# Altium PCB Copy of corePCB3.PcbDoc (part 3 of 3)
Units mil, origin at the board's own origin, x right, y up, seen from the top; angles counter-clockwise.
Board outline 6000 x 4000 mil, 6 copper layers (Top Layer, Layer 3, Layer 1, Layer 2, Layer 4, Bottom Layer), stack 32.111 mil thick; 90 components, 166 nets, 637 pads, 492 vias.
Unrouted connection lines stored in the file: 227.
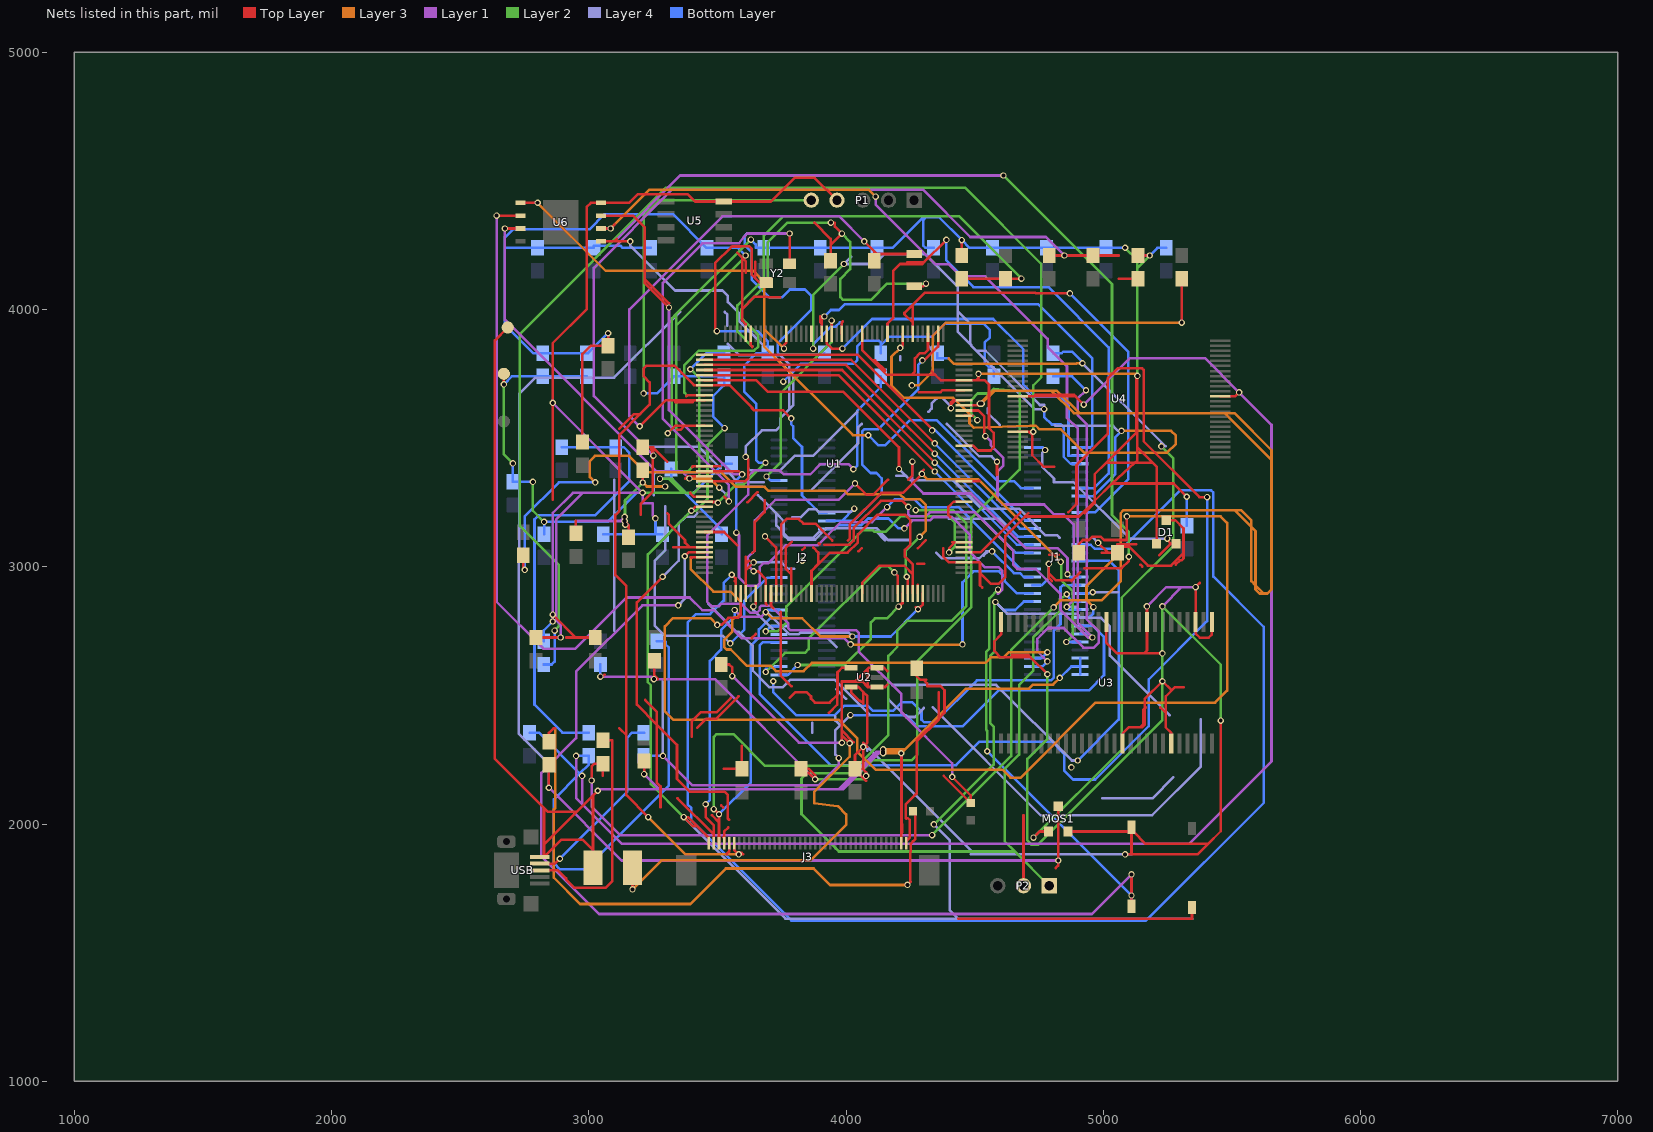
[diagram p7: the nets of this part, all layers, seen from the top]

## Via types
v1: diameter 25, hole 15, Top Layer to Bottom Layer, 492 vias

## Nets (pads, with @x,y where several pads share a name; then routed paths per layer and width w, separated by ;. In a path a pad name is that pad's centre, name@x,y a point inside that pad or via, vN(x,y) a via of type N, cw(c..) or ccw(c..) an arc to the next point about the centre after c; other vN are vias at no path point) (continued)
LED1: J1.56 U1.56 | length 2029.7
  Top Layer w10: U1.56@3747.85,2896.24 3747.85,3040 3747.85,3164.92 3769.44,3186.5 3815.47,3186.5 3834.47,3167.5 3881,3167.5 3946.5,3102 ; 3893.5,3091.5 3897,3088 ; 4007.74,3102 4013.83,3108.09 4013.83,3163.54 4137.79,3287.5 4221.5,3287.5 v1(4295,3361) ; v1@4294.51,3369.51 4302,3377
  Layer 2 w10: v1(4835,3019) 4837.5,3016.5 4837.5,2947.5 4882,2903 4882,2732.6 v1(4857,2707.6)
  Layer 3 w10: v1(4295,3361) 4315,3341 4513,3341 v1(4835,3019)
  Bottom Layer w10: v1(4857,2707.6) J1.56@4910,2707.6
NetC1_1: C1.1 D1.3 U1.6 | length 2829.4
  Top Layer w10: U1.6@3450,3725.59 3488.98,3725.59 ; v1(4206,3380) 4206,3464 3990,3680 3696,3680 3650.41,3725.59 3522.14,3725.59 ; 4791,3047.5 4827,3047.5 ; v1(4980,3093) 5018,3055 ; 4995,3055 5018,3055 ; 5129,3088 5055.06,3088 C1.1@5055.06,3078.5 ; 5145,3008 5152,3001 ; D1.3@5245,3181.26 5280,3181.26 5312,3149.26 5312,3052.87 ; 5281.42,3008 5298,3024.59 5303.59,3024.59 5312,3033 5312,3052.87 ; 3488.98,3725.59 3522.14,3725.59 ; 3488.98,3725.59 3490.14,3726.75 3520.98,3726.75 3522.14,3725.59 ; 5018,3055 C1.1@5055.06,3055 C1.1@5055.06,3078.5 ; C1.1@5055.06,3078.5 5099.76,3078.5 5173.76,3004.5 5263.63,3004.5 5312,3052.87
  Layer 4 w10: 4195,3353 4233,3353 ; v1(4206,3380) 4233,3353 ; 4233.46,3353 4233,3353 ; 4400,3186.46 4597.54,3186.46 4622.67,3161.33 ; 4830,3113 4820,3123 4798,3123 4797,3122 4776,3122 4672,3226 4529,3226 4419,3336 4250,3336 4233,3353 ; 4960,3113 v1(4980,3093)
NetC2_2: C2.2 C4.2 R2.1 U1.38 | length 756.8
  Top Layer w10: C2.2@2950.06,3130 2950.06,3177.94 ; v1(3139.06,3177.94) 3155.06,3161.94 ; v1(3142.51,3164) 3155.06,3161.94 ; v1@3144.25,3162.5 3155.06,3151.68 ; C4.2@3155.06,3115 3155.06,3151.68 ; v1(3210,3327.55) R2.1@3210,3375 ; 3155.06,3151.68 3155.06,3161.94
  Layer 1 w10: 2950.06,3177.94 3123.06,3177.94 ; v1(3139.06,3177.94) 3123.06,3177.94 ; v1(3139.06,3193.94) 3123.06,3177.94
  Layer 2 w10: v1(3139.06,3193.94) 3139.06,3256.61 3142.51,3260.06 ; v1(3142.51,3164) 3142.51,3260.06 ; v1(3210,3327.55) 3142.51,3260.06
  Layer 3 w10: v1(3210,3327.55) 3225.55,3312 v1(3296.67,3312)
NetC3_1: C3.1 U1.81 | length 2461.4
  Top Layer w10: v1@2745,2998.06 v1@2745.06,2998.13 ; C3.1@2745.06,3045 v1@2745.06,2998.13 ; v1(2751,2988) 2745.06,2993.94 v1@2745.06,2998.13 ; v1(4236,2961) 4239.98,2957.02 4239.98,2933.98 U1.81@4239.98,2896.24
  Layer 2 w10: v1(4236,2961) 4231.5,2965.5 4231.5,3061.5 v1(4286,3116)
  Layer 3 w10: v1(3025,3328) 3004,3349 3004,3411 3024,3431 3157,3431 3221,3367 3515.78,3367 3572.5,3310.28 3683.54,3310.28 3698.82,3295 3995.08,3295 4008.58,3281.5 4209.84,3281.5 4228.54,3262.8 4288,3262.8 4310.5,3240.3 4310.5,3140.5 v1(4286,3116)
  Bottom Layer w10: v1(2751,2988) 2751,3195 2884,3328 v1(3025,3328)
NetC5_1: C5.1 U1.125 | length 1581.9
  Top Layer w10: 4282.5,3678.5 4367.29,3678.5 4375.01,3686.22 U1.125@4459.09,3686.22 ; v1(5305.06,3949.06) C5.1@5305.06,4120
  Layer 3 w10: v1(4256,3705) 4282.83,3705 4337.83,3760 4337.83,3898.26 4388.64,3949.06 v1(5305.06,3949.06)
NetC8_2: C8.2 U1.9 Y1.1 | length 2259.8
  Top Layer w10: 3379,3663 3382.54,3666.54 U1.9@3450,3666.54 ; 3877.13,4338 3940.06,4275.06 3940.06,4251.45 ; C8.2@3940.06,4190 3940.06,4251.45 ; v1(3941,4338) 3957,4338 3957,4322 v1(3983.81,4295.19) 3940.06,4251.45 ; Y1.1@4265,4090 4300,4090 v1(4311,4101)
  Layer 2 w10: 3382.54,3666.54 3371.5,3677.57 3371.5,3784 3427.5,3840 3643,3840 3659,3856 3659,3900.93 3593.5,3966.43 3593.5,4000.5 3696.5,4103.5 3696.5,4262 3772.5,4338 v1(3941,4338) ; v1(3983.81,4295.19) 4016,4263 4016,4157 3978.26,4119.26 3978.26,4048 3989.01,4037.24 4096.37,4037.24 4160.13,4101 v1(4311,4101)
NetC9_2: C9.2 U1.10 Y1.2 | length 2204.7
  Top Layer w10: v1(3198,3546) 3298.85,3646.85 3410.13,3646.85 ; 3336.22,3639.22 3402.5,3639.22 3410.13,3646.85 ; U1.10@3450,3646.85 3410.13,3646.85 ; v1(4071,4265) 4110.06,4225.94 ; C9.2@4110.06,4190 C9.2@4110.06,4215.98 ; Y1.2@4265,4215.98 C9.2@4120.02,4215.98 ; C9.2@4110.06,4215.98 C9.2@4120.02,4215.98 ; C9.2@4110.06,4215.98 4110.06,4225.94 ; 4110.06,4225.94 C9.2@4120.02,4215.98
  Layer 1 w10: v1(3198,3546) 3158,3586 3158,4000 3520,4362 3974,4362 v1(4071,4265)
NetC10_2: C10.2 U1.30 Y2.1 | length 1888
  Top Layer w10: U1.30@3450,3253.15 U1.30@3479,3253.15 ; 3482.65,3250.5 3482.15,3250 U1.30@3479,3253.15 ; v1(3498,3916) 3491.5,3922.5 v1@3491.5,3925.5 ; v1@3501,3916 v1@3491.5,3925.5 ; v1(3502,3249) 3497.85,3253.15 U1.30@3479,3253.15 ; 3590.58,4243.42 3554.56,4243.42 ; 3616.5,3250.5 3656,3290 ; 3648,4186 3648,4121 ; Y2.1@3690,4105 3664,4105 3648,4121 ; v1@3491.5,3925.5 3491.5,4180.36 3554.56,4243.42 ; 3554.56,4243.42 3557.14,4246 3624,4246 3633,4237 3633,4136 3648,4121
  Layer 2 w10: v1(3502,3249) 3572.5,3319.5 3602,3319.5 v1(3687,3404.5)
  Bottom Layer w10: v1(3498,3916) 3656.61,3916 3696.07,3876.55 C10.2@3696.07,3830.59 3652.59,3830.59 3605,3783 3605,3680 3651.5,3633.5 3651.5,3413.55 3660.55,3404.5 v1(3687,3404.5)
NetC11_2: C11.2 U1.29 Y2.3 | length 2846.3
  Top Layer w10: 3394,3286.83 3408,3272.83 U1.29@3450,3272.83 ; 3526.17,3272.83 v1(3545,3254) ; Y2.3@3780.55,4177.83 v1@3780.55,4286.55 ; v1(3780.55,4295.5) v1@3780.55,4286.55 ; v1@3781,4287 v1@3780.55,4286.55
  Layer 1 w10: v1(3545,3254) 3545,3318 3288,3575 3288,4104 3441.34,4257.34 3584,4257.34 3603.34,4282.84 3616,4295.5 v1(3780.55,4295.5)
  Bottom Layer w10: v1(3780.55,4295.5) 3616,4295.5 3606,4285.5 3606,4250 3633,4223 3633,4116.5 3702,4047.5 3751.5,4047.5 3782,4078 3840,4078 3866,4052 3866,4000 3735,3869 3735,3832 3743,3824 3916.07,3824 C11.2@3916.07,3830.59
NetC28_2: C28.2 J3.1 | length 1079.7
  Top Layer w10: J3.1@4234.65,1925 4234.65,1934 4248,1947.35 4248,2015 4240,2023 4233,2023 ; 4234.65,2021.35 4233,2023 ; C28.2@4275,2605 4275,2574 4288,2561 4301,2561 ; 4311.45,2561 4301,2561 ; 4361.22,2511.24 4361.22,2410.81 ; 4233,2023 4233,2077 4274.69,2118.69 4274.69,2320.26 ; 4274.69,2320.26 4274.69,2324.29 4361.22,2410.81 ; 4274.69,2320.26 4361.22,2406.78 4361.22,2410.81 ; 4301,2561 4315.72,2546.28 4315.72,2536.5 4366.5,2536.5 4383,2520 4383,2432.59 4361.22,2410.81
NetC29_2: C29.2 F1.2 U2.1 U2.3 | length 2892.6
  Top Layer w10: v1(3170,1746) F1.2@3170,1830 ; C29.2@3515,2620 3546,2620 3558,2608 v1(3558,2575) ; v1(3984,2316) 3984,2344 ; v1(4014,2314) 3984,2344 ; 4030,2317 3984,2363 ; 4161,2541.6 4152,2532.6 U2.1@4120,2532.6 4086.4,2532.6 ; 4161,2594.37 4147.97,2607.4 U2.3@4120,2607.4 4088,2607.4 4084,2603.4 ; 3984,2344 3984,2363 ; 3984,2363 3984,2554 4034.6,2554 ; 4034.6,2554 4084,2603.4 ; 4034.6,2554 4065,2554 ; 4065,2554 4084,2535 ; 4065,2554 4084,2532.6 ; 4084,2532.6 4086.4,2532.6 ; 4084,2532.6 4084,2535 ; 4084,2535 4086.4,2532.6 ; 4084,2535 4084,2603.4
  Layer 1 w10: v1(3558,2575) 3817,2316 v1(3984,2316)
  Layer 3 w10: v1(3170,1746) 3282.5,1858.5 3862,1858.5 4000.5,1997 4000.5,2037 3968,2069.5 3876.5,2080 3876.5,2124 4014,2261.5 v1(4014,2314)
NetC30_2: C30.2 U2.4 | length 959.2
  Top Layer w10: 3401,2339.84 3401,2400 3435,2434 3496,2434 3552.5,2490.5 ; 3525.84,2215 C30.2@3595.06,2215 3595.06,2304 ; 3780.5,2490.5 3803,2513 3847,2513 3864,2496 3864,2487 3879,2472 3936,2472 3966,2502 ; 3934,2432 3966,2464 3966,2502 ; U2.4@4020,2607.4 3984,2607.4 3968,2591.4 ; 3966,2502 3966,2589.4 3968,2591.4 ; 3966,2502 3968,2504 3968,2591.4
NetC35_2: C35.2 C36.2 R16.1 U4.12 U4.37 | length 7906.4
  Top Layer w10: U4.12@4667.6,3662.48 4730.5,3662.48 ; v1(4924.33,3630.5) 4918.33,3636.5 4892.35,3662.48 ; U4.37@5455,3662.48 5512.48,3662.48 v1(5528,3678) ; 4730.5,3662.48 4892.35,3662.48 ; 4730.5,3662.48 4736.52,3668.5 4886.33,3668.5 4892.35,3662.48
  Layer 1 w10: v1(2951,2265) 2951,2101 2974,2078 ; v1(2974,2187) 2974,2078 ; v1(4924.33,3630.5) 5104.83,3811 5395,3811 v1(5528,3678) 5654,3552 5654,2243 5333.89,1922.89 3129.11,1922.89 2974,2078
  Bottom Layer w10: C36.2@2770.06,2355 2806,2355 2964.5,2196.5 ; v1(2951,2265) R16.1@3000.06,2265 3000.06,2232.06 2964.5,2196.5 ; v1(2974,2187) 2964.5,2196.5 ; C35.2@3265.06,2710 3297.5,2710 3298.5,2709 3298.5,2698.5 3311.5,2685.5 3311.5,2149.27 2986.23,1824 2888,1824 2864,1848 2864,2096 2964.5,2196.5
NetDS0_1: DS0.1 R10.2 | length 2465.6
  Top Layer w10: R10.2@2845,2320 2845,2354 2864,2373 2869,2373 ; v1(4239,1763) 4249,1773 ; 4251,1775 4249,1773 ; DS0.1@4260,2050 4270,2050 4270,1942 4260,1932 4251,1923 4251,1892 4249,1890 4249,1773
  Layer 3 w10: 2864,2373 2869,2368 2869,2062 2864,2057 2864,1791 2966,1689 3394.94,1689 3532.94,1827 3874,1827 3938,1763 v1(4239,1763)
NetMOS1_1: MOS1.1 R13.2 R14.2 | length 3038.5
  Top Layer w10: v1(4729,1947) 4752.79,1970.79 MOS1.1@4787.6,1970.79
  Layer 2 w10: v1(4729,1947) 5072,2290 5072,2880 5272.5,3080.5 5272.5,3421.5 v1(5226,3468)
  Layer 3 w10: 4399,3810 4420.5,3788.5 4893.89,3788.5 4896.39,3791 v1(4919,3791)
  Layer 4 w10: v1(4919,3791) 5226,3484 ; v1(5226,3468) 5226,3484 ; 5242,3468 5226,3484
  Bottom Layer w10: R14.2@4355.06,3830 4355.06,3810 4399,3810 ; R13.2@4805.06,3830 4838.16,3830 4843.78,3835.62 4880,3835.62 4919,3796.62 v1(4919,3791)
NetPWR_1: PWR.1 R15.1 | length 3086.2
  Top Layer w10: 4380,2186.93 PWR.1@4485,2081.93 4485,2111 v1(4413,2183)
  Layer 1 w10: v1(4029,3379) 4009,3399 3901,3399 3861,3359 3758,3359 3742,3375 3643,3375 3619.97,3351.97 3619.97,3280.97 3460,3121 3460,2864 3477,2847 3506.5,2847 3515,2855.5 3593.5,2855.5 3627.5,2821.5 3654.5,2821.5 3664,2831 3664,2841 3672,2849 3707,2849 3776,2780 3776,2760.5 3784,2752.5 4040.5,2752.5 4049,2744 4049,2671 4215.5,2504.5 4215.5,2433.5 4413,2236 v1(4413,2183)
  Bottom Layer w10: v1(4029,3379) 4044,3394 4044,3607 4135.06,3698.06 R15.1@4135.06,3740
NetR1_1: R1.1 U1.48 | length 4685.7
  Top Layer w10: v1(3499.5,2774) 3515.5,2774 3543,2801.5 3579.5,2801.5 3591,2813 3591,2862 3590.37,2862.63 ; 3590.37,2862 3590.37,2862.63 ; U1.48@3590.37,2896.24 3590.37,2862.63 ; R1.1@4905.06,3055 4905.06,3088 4921.06,3104 4944.09,3104 4956.59,3116.5 4991,3116.5 5003.5,3104 5091.06,3104 ; v1@5091.06,3196.94 5091.06,3104 ; v1(5092,3196) 5092,3104 5091.06,3104
  Layer 3 w10: v1(3499.5,2774) 3473.5,2800 3328,2800 3296,2768 3296,2438 3328,2406 3971,2406 4043.5,2333.5 4043.5,2282.5 4115,2211 4609,2211 4639.5,2180.5 4679.5,2180.5 4970.5,2471.5 5434.5,2471.5 5482,2519 5482,3170 5456,3196 v1(5092,3196)
NetR4_1: R4.1 R5.1 U1.171 | length 1916
  Top Layer w10: U1.171@3629.74,3905.33 3629.74,3862 3635,3856.74 3635,3854 ; R5.1@4450.06,4120 R4.1@4620.06,4120 v1(4682,4120)
  Layer 2 w10: 3635,3856.74 3577.5,3914.24 3577.5,4016.5 3680.5,4119.5 3680.5,4287.33 3756.17,4363 4439,4363 v1(4682,4120)
NetR11_2: R11.2 USB.3 | length 907.6
  Top Layer w10: USB.3@2809,1820 2880,1820 2912,1788 2912,1784 2944,1752 3065,1752 3092,1779 3092,2325 R11.2@3055.06,2325
NetR12_2: R12.2 USB.2 | length 740
  Top Layer w10: USB.2@2809,1845.59 2868.59,1845.59 v1(2888,1865)
  Bottom Layer w10: v1(2888,1865) 3150,2127 3150,2337 3168,2355 R12.2@3215,2355
NetR18_1: R18.1 U4.19 | length 4700.6
  Top Layer w10: U4.19@4667.6,3524.68 4712,3524.68 ; v1(4728,3524.68) 4712,3524.68 ; 4808.5,3389.5 4768,3389.5 4724,3433.5 4724,3512.68 4712,3524.68
  Layer 2 w10: v1(2867,2752) 2884,2769 2884,3006 2732,3158 2732,3905 3301,4474 4462,4474 4759,4177 4759,3736 4728,3705 v1(4728,3524.68)
  Bottom Layer w10: R18.1@2825.06,2620 2856,2620 2867,2631 v1(2867,2752)
NRF_CE: J2.25 U1.155 | length 818
  Top Layer w10: v1(3944,3957) 3944.7,3956.3 3944.7,3940.3 U1.155@3944.7,3905.33
  Layer 2 w10: v1(3691,3351) 3747,3407 3747,3676 3944,3873 v1(3944,3957)
  Bottom Layer w10: v1(3691,3351) 3706.06,3335.94 J2.25@3740,3335.94
NRF_CS: J1.34 U1.153 | length 2588
  Top Layer w10: U1.153@3984.07,3905.33 3984.07,3950.07 3988,3954
  Layer 2 w10: v1(3872,3848) 3872,4057 v1(3992,4177)
  Layer 4 w10: 4020,4205 v1(3992,4177) 4111,4177 4148.5,4214.5 4308.5,4214.5 4318,4205 4435,4088 4435,3993 ; 4508.63,3839.75 4543.25,3839.75 4754,3629 4770,3629 ; v1(4770,3613) 4733.5,3613 4486.17,3860.33 4486.17,3862.22 4483.5,3864.89 ; 4435,3993 4435,3913.39 4483.5,3864.89 ; 4435,3993 4483.5,3944.5 4483.5,3864.89
  Bottom Layer w10: v1(3872,3848) 3872,3864 3941.5,3933.5 3959.65,3933.5 3976.22,3950.07 3984.07,3950.07 ; v1(4770,3613) 4770,3583 4800,3553 4835.59,3553 4846.5,3542.09 4846.5,3427.5 4873.49,3400.51 J1.34@4910,3400.51
PA0: J2.42 U1.40 WKUP.1 | length 6551.3
  Top Layer w10: v1(3373,3041) 3388.3,3056.3 U1.40@3450,3056.3 ; WKUP.1@5110,1680 v1(5110,1722) 5110,1786 v1(5110,1804)
  Layer 1 w10: v1(3348,2850) 3209,2850 2951,2592 2951,2334 2816,2199 2816,1874 3040,1650 4956,1650 v1(5110,1804) ; v1(4227,3149) 4258.5,3180.5 4326.5,3180.5 4339.5,3193.5 4411.69,3193.5 4481.5,3123.69 4481.5,3057 4541,2997.5 4594.04,2997.5 4608,2983.54 4608,2912 4591,2895 v1(4591,2911)
  Layer 2 w10: v1(4549,2283) 4549,2362.03 4544.5,2366.53 4544.5,2668.5 4557.5,2681.5 4557.5,2877.5 v1(4591,2911)
  Layer 4 w10: v1(3348,2850) 3373,2875 v1(3373,3041)
  Bottom Layer w10: J2.42@3925.04,3146.97 3955.5,3146.97 3969.22,3160.69 4059.19,3160.69 4086,3187.5 4164.92,3187.5 4203.42,3149 v1(4227,3149) ; v1(4549,2283) v1(5110,1722)
PA1: J1.3 U1.41 | length 1949.8
  Top Layer w10: 3396.39,3036.61 3400.09,3036.61 ; U1.41@3450,3036.61 3402.41,3036.61 ; 3400.09,3036.61 3402.41,3036.61 ; 3400.09,3036.61 3401.25,3035.46 3402.41,3036.61
  Layer 3 w10: 3396.39,3036.61 3396.39,2992.11 3485,2903.5 3551.78,2903.5 3590.5,2864.78 3590.5,2817 3577.07,2803.57 3568,2803.57 3557.5,2793.07 3557.5,2747 3526.5,2716 3526.5,2688 3536,2678.5 3552,2678.5 3616,2614.5 3708,2614.5 3728,2594.5 3835.5,2594.5 3867.5,2626.5 4541.83,2626.5 4562.83,2647.5 4612.5,2647.5 4632.5,2667.5 v1(4783,2667.5)
  Bottom Layer w10: J1.3@4724.96,2644.61 4760.11,2644.61 v1(4783,2667.5)
PA3: J1.44 U1.47 | length 5918.1
  Top Layer w10: v1(3556,2969) 3570.69,2954.31 3570.69,2941.31 ; 3567,2945 3570.69,2941.31 ; U1.47@3570.69,2896.24 3570.69,2941.31
  Layer 4 w10: 3930,2721 3963,2688 ; 3963,2523.5 4000,2486.5 ; 4164,2486.5 4234.5,2416 4268,2416 4303,2451
  Bottom Layer w10: v1(3556,2969) 3524,2937 3524,2868 3472,2816 3416,2816 3384,2784 3384,2076 3398.5,2061.5 3398.5,2013 3787.5,1624 5166,1624 5624,2082 5624,2766 5428,2962 5428,3288 5419,3297 5298,3297 5070.27,3069.27 4967.33,3069.27 4951.04,3085.55 J1.44@4910,3085.55
PA5: J1.46 U1.51 | length 2003
  Top Layer w10: 3633.43,2722.57 3649.43,2738.57 ; 3649.43,2854.43 U1.51@3649.43,2896.24
  Layer 4 w10: v1(3640,2845) 3640,2832 3719.5,2752.5 ; 4180.45,2540.38 4278,2540.38 4278.62,2541 4584,2541 4878.16,2246.84 v1(4901,2246.84)
  Bottom Layer w10: v1(4901,2246.84) 5059.93,2405.77 5059.93,2986.63 5024,3022.56 J1.46@4910,3022.56
PA7: J1.48 U1.53 | length 2305.9
  Top Layer w10: v1(3641,2982.8) 3657,2982.8 3688.8,2951 U1.53@3688.8,2896.24 3688.8,2856 3692.44,2852.36 ; 3746,2824.04 3746,2577 3788,2535 ; v1(4035,3324) 4079,3280 4105,3280 4164,3339 ; 4243,3339 4258,3354 v1(4258,3409)
  Layer 1 w10: v1(3641,2982.8) 3617.5,3006.3 3617.5,3036 3645.5,3064 3645.5,3180.5 3725,3260 3971,3260 v1(4035,3324) ; v1(4258,3409) 4258,3328 4301.06,3284.94 4486.06,3284.94 4698.35,3072.65 4822.35,3072.65 4861,3034 v1(4861,2971)
  Bottom Layer w10: v1(4861,2971) 4872.43,2959.57 J1.48@4910,2959.57
PA9: J1.51 P2.1 U1.120 | length 4798.5
  Top Layer w10: U1.120@4459.09,3587.8 4493.2,3587.8
  Layer 2 w10: v1(4511,3570) 4487,3594 4487,3648.5 4512,3673.5 4555.5,3673.5 4574,3692 4675,3682 4675,3378 4487.06,3190.06 4487.06,2843.06 4277.5,2633.5 4277.5,2269.5 4256,2248 4105,2248 4054.5,2197.5 3848.5,2197.5 3827,2176 3827,2038 3972,1893 4657,1893 ; P2.1@4790,1760 4657,1893 ; v1(4858,2893) 4858,2891 4832,2875 4832,2829 4727.5,2724.5 4727.5,2595.41 4673.04,2540.95 4673.04,2270.04 4617,2214 4617,1933 4657,1893
  Bottom Layer w10: v1(4858,2893) 4877,2865.08 J1.51@4910,2865.08
PA10: J1.52 P2.2 U1.121 | length 1797.2
  Top Layer w10: U1.121@4459.09,3607.48 4514.52,3607.48 4538,3584 4538,3512 v1(4542,3508) ; P2.2@4690,1760 4690,2034
  Layer 1 w10: v1(4542,3508) 4563,3487 4563,3472 4611,3424 4611,3392 4589,3370 4589,3261 4608,3242 4770,3242 4808,3204 4846,3204 4885,3165 4885,2871 v1(4858,2844)
  Layer 4 w10: v1(4858,2844) 4895,2844 ; 4996,2100 5191,2100 5273,2182
  Bottom Layer w10: v1(4858,2844) 4868.42,2833.58 J1.52@4910,2833.58
  other v1: 4876,2220
PA11: J1.53 R11.1 U1.122 | length 7227.9
  Top Layer w10: v1(3011,2169) 3011,2224 3022,2235 R11.1@3055.06,2235 3055.06,2187.5 ; U1.122@4459.09,3627.17 v1@4513.17,3627.17 ; v1(4520,3634) v1@4513.17,3627.17 ; v1(4527,3634) 4520.17,3627.17 v1@4513.17,3627.17
  Layer 1 w10: v1(3011,2169) 3011,2068 3122,1957 v1(4335,1957)
  Layer 2 w10: v1(4335,1957) 4642,2264 4642,2677 v1(4807,2842)
  Layer 3 w10: v1(4520,3634) 4570,3684 4577,3684 ; v1(4527,3634) 4577,3684 ; v1(4807,2842) 4834,2869 4936,2869 ; v1(4962,2843) 4936,2869 ; 4577,3684 4799,3684 ; 4799,3684 4820,3684 4907,3597 ; 4799,3684 4886,3597 4907,3597 ; 4907,3597 5472,3597 ; 4936,2869 4935,2870 4935,2925 5067.5,3057.5 ; 4936,2869 4993,2869 5067.5,2943.5 5067.5,3057.5 ; 5067.5,3057.5 5067.5,3208 5079.5,3220 5511,3220 ; 5472,3597 5510,3597 5654,3453 5654,3415 ; 5472,3597 5654,3415 ; 5511,3220 5576,3155 ; 5511,3220 5536,3220 5576,3180 5576,3155 ; 5576,3155 5592,3139 5592,2928 ; 5576,3155 5576,2944 5592,2928 ; 5592,2928 5592,2912 5608,2896 5624,2896 ; 5592,2928 5624,2896 ; 5624,2896 5638,2896 5654,2912 5654,3415
  Bottom Layer w10: J1.53@4910,2802.09 4945.09,2802.09 4962,2819 v1(4962,2843)
PA12: J1.54 R12.1 U1.123 | length 4420.4
  Top Layer w10: v1@4408,3615.8 v1(4408,3617) 4408,3630.85 ; U1.123@4459.09,3646.85 4424,3646.85 ; 4408,3630.85 4408,3638.85 4416,3646.85 4424,3646.85 ; 4408,3630.85 4424,3646.85
  Layer 1 w10: v1(3288,2265) 3402.5,2150.5 3893.5,2150.5 3972,2229 v1(3972,2256)
  Layer 4 w10: 3099,2752 3099,3338 ; 3227,3466 3429,3466 3512,3383 ; v1(3288,2265) 3288,2563 ; 3620,3383 3628.5,3374.5 3743.5,3374.5 3800,3431 3872,3431 4043,3602 ; 3869,2355 3869,2394 ; 3959,2418 3959,2402 3972,2389 ; v1(3972,2256) 3958.5,2269.5 3958.5,2365 v1(4017,2423.5) ; 4320,3602 4333,3615 4333,3635 4352,3654 ; 4377,3654 4408,3623 v1(4408,3617)
  Bottom Layer w10: R12.1@3215,2265 v1(3288,2265) ; v1(4017,2423.5) 4233.5,2423.5 4277.5,2379.5 4452.5,2379.5 4592.4,2519.4 4943.78,2519.4 5002.94,2578.56 5002.94,2727.65 4960,2770.59 J1.54@4910,2770.59
PB2: J1.55 U1.58 U6.6 | length 5100.9
  Top Layer w10: U6.6@3047.99,4315 v1(3085,4315) 3101,4331 ; U1.58@3787.22,2896.24 3787.22,2970.78 ; 3787.22,2993.78 3787.22,2970.78 ; 3788.5,3096.5 3765,3073 3765,2993 3787.22,2970.78 ; 3829.88,3065.38 3840,3075.5 ; 3915,3086 4014.37,3086 4029.83,3101.46 4029.83,3150.54 4135.29,3256 4219,3256 v1(4242.5,3232.5) ; 4048.43,3059.93 4060.5,3072
  Layer 1 w10: v1(4115,4439) 4115,4408 4347.34,4175.66 4400.63,4175.66 4447.29,4129 4540.49,4129 4783.5,3885.99 4783.5,3854.5 4859,3779 4859,3579 4901,3537 4901,2782 v1(4958,2725) 4941,2725 4834,2832 4834,2895 4737.63,2991.37 4666.13,2991.37 4649.5,3008 4649.5,3063.66 4501.31,3211.84 4325.84,3211.84 4310.5,3196.5 4249.84,3196.5 4242.5,3203.84 v1(4242.5,3232.5)
  Layer 3 w10: v1(3085,4315) 3236,4466 4088,4466 v1(4115,4439)
  Bottom Layer w10: J1.55@4910,2739.09 4943.91,2739.09 v1(4958,2725)
PB6: J1.24 U1.164 U6.1 | length 2847.7
  Top Layer w10: U6.1@2735,4415 2800.91,4415 v1(2801,4415) ; v1(3759,3848) 3759,3862 3767.54,3870.54 U1.164@3767.54,3905.33
  Layer 3 w10: v1(2801,4415) 3066,4150 3639.75,4150 3682,4107.75 3682,3925 ; v1(3759,3848) 3682,3925 ; v1(4086.5,3511.5) 4026.5,3511.5 3682,3856 3682,3925
  Bottom Layer w10: v1(4086.5,3511.5) 4126,3472 4151,3472 4249,3570 4352.7,3570 4589.7,3333 4653.02,3333 4680,3306.02 J1.24@4724.96,3306.02
PB10: J2.2 U1.79 | length 883.6
  Top Layer w10: v1(4188,2978) 4200.61,2965.39 4200.61,2934.61 U1.79@4200.61,2896.24 ; 4277,3011 4305,3011
  Layer 2 w10: v1(3688,2591) 3762,2665 3840,2665 3855,2680 3855,2720.5 4136,3001.5 4164.5,3001.5 v1(4188,2978)
  Bottom Layer w10: v1(3688,2591) 3688,2603.54 J2.2@3740,2611.54
PB11: J2.1 U1.80 | length 690.9
  Top Layer w10: v1(4204.3,2845) 4220.3,2861 ; v1@4207,2845 4220.3,2858.3 4220.3,2861 ; U1.80@4220.3,2896.24 4220.3,2861
  Layer 2 w10: v1(3812,2618) 3994.43,2618 4096.5,2720.07 4096.5,2784 4111.84,2799.34 4158.64,2799.34 v1(4204.3,2845)
  Bottom Layer w10: J2.1@3740,2580.04 3774.04,2580.04 v1(3812,2618)
PB13: J2.5 U1.93 | length 4742.7
  Top Layer w10: U1.93@4459.09,3056.3 4522.3,3056.3 4677.5,3211.5 ; 4864,3211.5 4896,3243.5 4896,3395 5017,3516 5017,3732 5056,3771 5151,3771 5157,3765 5157,3488 5374,3271 v1(5404,3271)
  Bottom Layer w10: J2.5@3740,2706.02 3676,2706.02 3664,2694.02 3664,2505 3940,2229 4428,2229 4519,2320 4800,2320 4848,2272 4848,2208 4883,2173 4969,2173 5177,2381 5177,2562 5404,2789 v1(5404,3271)
PB14: J2.6 U1.94
PB15: J2.7 U1.95 | length 1252.3
  Top Layer w10: v1(4401,3056) 4401,3072 4424.67,3095.67 ; 4413.67,3095.67 4424.67,3095.67 ; U1.95@4459.09,3095.67 4424.67,3095.67
  Layer 2 w10: v1(3688,2749) 3733,2749 3768,2784 3768,2846 4063.71,3141.71 4105.33,3141.71 4111.04,3136 4154,3136 4214.5,3196.5 4400,3196.5 4422.5,3174 4422.5,3077.5 v1(4401,3056)
  Bottom Layer w10: v1(3688,2749) 3708.02,2769.02 J2.7@3740,2769.02
PC4: J1.49 U1.54 | length 1832
  Top Layer w10: U1.54@3708.48,2896.24 3708.48,2848 3717,2839.48
  Bottom Layer w10: v1(3717,2555) 3717,2513 3808,2422 3956,2422 3993,2459 4085,2459 4104.5,2439.5 4182.5,2439.5 4217,2474 4256,2474 4293.5,2436.5 4293.5,2406 4304,2395.5 4346.5,2395.5 4509,2558 4797,2558 4807,2568 4807,2750 4834,2777 4834,2920 4842.07,2928.07 J1.49@4910,2928.07
PC5: J1.50 U1.55 | length 2750.7
  Top Layer w10: v1(3685,3118) 3728.17,3074.83 3728.17,3042.82 U1.55@3728.17,2896.24
  Layer 4 w10: 3465.52,2855.86 3574.74,2746.63 3583.63,2746.63 3637.5,2692.76 3637.5,2596.5 3703,2531 3753,2531 3782.5,2560.5 3956.43,2560.5 4090.93,2426 ; 4337.5,2453.5 4757,2034 5189.79,2034 5379.79,2224 5379.79,2406.21 ; v1(4959,2901) 5058,2901
  Bottom Layer w10: J1.50@4910,2896.57 4954.57,2896.57 v1(4959,2901)
PC10: J1.40 U1.139 | length 1960.3
  Top Layer w10: U1.139@4259.67,3905.33 4259.67,3948.83 ; 4303.78,4063 4259.67,4018.89 ; v1(4870.13,4063) 4738.06,4063 4735.56,4065.5 4306.28,4065.5 4259.67,4018.89 ; 4259.67,3948.83 4259.67,4018.89 ; 4259.67,3948.83 4227.5,3981 4227.5,3986.72 4259.67,4018.89
  Bottom Layer w10: v1(4870.13,4063) 5097.5,3835.63 5097.5,3341.69 4967.35,3211.54 J1.40@4910,3211.54
PC12: J1.38 U1.141 | length 2509
  Top Layer w10: v1(4211,3851) 4220.3,3860.3 U1.141@4220.3,3905.33
  Layer 3 w10: v1(4211,3851) 4177,3817 4177,3705 4225,3657 4416,3657 4480,3593 4480,3557 4496,3541 4717.18,3548.18 4738.32,3548.18 4752,3534.5 4835.5,3534.5 4926,3444 5248,3444 5282,3478 5282,3510 5264,3528 v1(5071,3528)
  Layer 4 w10: 4211,3803 4211,3819 ; 4320,3857.5 4336.5,3841 4336.5,3781.98 ; 4551,3616 4551,3597.32 4597.82,3550.5 ; 4812,3550.5 4814.5,3548 5038,3548 5058,3528
  Bottom Layer w10: J1.38@4910,3274.53 4961.53,3274.53 5046,3359 5046,3503 v1(5071,3528)
PD2: J1.37 U1.144 | length 2080.8
  Top Layer w10: U1.144@4161.24,3905.33 4161.24,3945.06 4183.37,3967.19 4183.37,4128.37 4183.37,4150.56 4209.81,4177 4297,4177 4304,4184 ; 4239,4184 4304,4184 ; 4325,4205 4304,4184 ; v1(4390.5,4270.5) 4304,4184
  Bottom Layer w10: v1(4390.5,4270.5) 4390.5,4191.5 4495,4087 4787,4087 5021.25,3852.75 5021.25,3362.59 4964.69,3306.02 J1.37@4910,3306.02
PE2: J1.20 U1.1 | length 1543.8
  Top Layer w10: U1.1@3450,3824.02 4045.98,3824.02 v1@4335,3535
  Bottom Layer w10: v1(4335,3530) 4337.44,3530 4342.44,3535 4697.4,3180.04 J1.20@4724.96,3180.04
PE3: J1.19 U1.2 | length 1546.6
  Top Layer w10: U1.2@3450,3804.33 4020.42,3804.33 v1(4344.95,3479.8)
  Bottom Layer w10: v1(4344.95,3479.8) 4676.21,3148.54 J1.19@4724.96,3148.54
PE4: J1.18 U1.3 | length 1551.7
  Top Layer w10: U1.3@3450,3784.65 4000.73,3784.65 4167.88,3617.5 4167.88,3617.12 v1(4345,3440)
  Bottom Layer w10: v1(4345,3440) 4667.95,3117.05 J1.18@4724.96,3117.05
PE5: J1.17 U1.4 | length 1556.4
  Top Layer w10: U1.4@3450,3764.96 3985.04,3764.96 v1(4345,3405)
  Bottom Layer w10: v1(4345,3405) 4664.45,3085.55 J1.17@4724.96,3085.55
PE6: J1.16 U1.5 | length 1561.3
  Top Layer w10: U1.5@3450,3745.28 3970,3745.28 v1(4345,3370.28)
  Bottom Layer w10: v1(4345,3370.28) 4661.22,3054.06 J1.16@4724.96,3054.06
PF6: J1.14 U1.24 U6.7 | length 3467.8
  Top Layer w10: U6.7@3047.99,4365 3172,4365 3217,4320 3217,4119 ; v1(3312,4008) 3217,4103 3217,4119 ; 3312,4024 3217,4119 ; U1.24@3450,3371.26 3583.74,3371.26 v1(3596,3359)
  Layer 1 w10: v1(3312,4008) 3312,3609 3562,3359 v1(3596,3359) ; v1(3574,3133) 3584,3123 3584,2959 3616,2927 3656,2927 3665,2936 3665,3000 3678,3013 3696,3013 3767,3084 3890.5,3084 3979.5,3173 4101,3173 v1(4160,3232)
  Bottom Layer w10: v1(3574,3133) 3574,3337 v1(3596,3359) ; v1(4160,3232) 4191,3263 4265,3263 4296,3232 4437.06,3232 4678,2991.06 J1.14@4724.96,2991.06
PF7: J1.13 U1.25 U6.3 | length 3139.9
  Top Layer w10: v1(2674,4315) U6.3@2735,4315 ; 3375,3343 3383.58,3351.58 v1@3399.58,3351.58 ; v1(3391,3343) v1@3399.58,3351.58 ; U1.25@3450,3351.58 v1@3399.58,3351.58
  Layer 1 w10: v1(2674,4315) 2674,3961.03 3264.03,3371 3363,3371 v1(3391,3343)
  Layer 3 w10: v1(3391,3343) 3472,3343 v1(3507,3308)
  Layer 4 w10: v1(3507,3308) 3537,3278 ; 3658,3278 3669.5,3266.5 3728.98,3207.02 ; 3899.25,3138.5 3874.25,3113.5 3775,3113.5 3757.15,3131.35 ; 4116.5,3138.5 4152,3103 ; 4247,3104 4164,3104 4118,3150 3925,3150 3880,3105 3776,3105 3757.15,3123.85 3757.15,3131.35 ; 4350.5,3055 4373,3032.5 4518,3032.5 4545.5,3060 4552,3060 ; 4535.31,3043.31 4552,3060 ; v1(4568,3060) 4552,3060 ; 3728.98,3207.02 3757.15,3178.85 3757.15,3131.35 ; 3728.98,3207.02 3728.98,3159.52 3757.15,3131.35
  Bottom Layer w10: v1(4568,3060) 4653,2975 4675.57,2975 4691,2959.57 J1.13@4724.96,2959.57
PF8: J1.12 U1.26 U6.5 | length 6068.6
  Top Layer w10: U6.5@3047.99,4265 3099,4265 ; 3109,4275 3099,4265 ; v1(3161,4265) 3099,4265 ; U1.26@3450,3331.89 3608,3331.89 3619.5,3343.39 ; v1(3610,3427) 3619.5,3417.5 ; v1(4788.5,3011) 4788.5,2995 4788.5,2974.71 ; 4800,2944.75 4788.5,2956.25 4788.5,2974.71 ; 4876.75,2944.75 4879.21,2947.21 ; 4911,2979 4879.21,2947.21 ; 4926.5,2994.5 5071.5,2994.5 5100,3023 v1(5100,3039) ; 3619.5,3343.39 3620,3343.89 3620,3417 3619.5,3417.5 ; 3619.5,3343.39 3619.5,3417.5 ; 4788.5,2974.71 4816,2947.21 4879.21,2947.21
  Layer 1 w10: 3109,4275 3355,4521 v1(4612,4521)
  Layer 2 w10: v1(4612,4521) 5034,4099 5034,3202 5100,3136 v1(5100,3039)
  Layer 4 w10: v1(3161,4265) 3161,4249 3336,4074 3520,4074 3541,4053 3541,4029 3584,3986 3584,3955.59 3716.59,3823 ; 3541,3866 3584,3823 3716.59,3823 ; v1(3610,3427) 3610,3443 3610,3467.54 3672.96,3530.5 3728,3530.5 3744.5,3547 3744.5,3577.5 3780,3613 ; 3716.59,3823 3744,3823 3780,3787 3780,3759.59 ; 3716.59,3823 3780,3759.59 ; 3780,3613 3780,3759.59 ; 3780,3613 3795.5,3628.5 3795.5,3744.09 3780,3759.59
  Bottom Layer w10: J1.12@4724.96,2928.07 4760.07,2928.07 4788.5,2956.5 v1(4788.5,3011)
PF9: J1.11 U1.27 U6.2 | length 4214.4
  Top Layer w10: v1(2642,4365) U6.2@2735,4365
  Layer 1 w10: v1(2642,4365) 2642,2864 2824,2682 2948,2682 3146.5,2880.5 3392.04,2880.5 3441.54,2831 3486.5,2831 3596,2721.5 3994.5,2721.5 v1(4018,2698)
  Layer 3 w10: v1(4018,2698) 4018.5,2697.5 4452.5,2697.5 v1(4453,2698)
  Bottom Layer w10: v1(4453,2698) 4453,2939.5 4495.5,2982 4595,2982 4617,2960 4617,2944 4664.43,2896.57 J1.11@4724.96,2896.57
PG3: J2.13 J3.37 U1.107 | length 2697
  Top Layer w10: 3422,2375 3456,2409 3495,2409 3582,2496 ; 3515,2072 3523,2064 ; 3523,1948.98 J3.37@3525.98,1946 ; J3.37@3525.98,1925 J3.37@3525.98,1946 ; 3543.06,1987.08 3525.98,1970 J3.37@3525.98,1946 ; U1.107@4459.09,3331.89 4497.11,3331.89 4515.89,3331.89 4519,3335 ; 4587,3358 v1(4587,3408)
  Layer 4 w10: 3253,3279 3253,3360 3261,3368 3484,3368 3488,3364 3545,3364 3581,3328 3681,3328 ; 3297,3235 3297,3064 3257,3024 3257,2770 3296,2731 3521,2731 v1(3550,2702) ; 3862,3295 4047,3480 4047,3541 4061,3555 ; 4392,3555 4518,3429 4566,3429 v1(4587,3408)
  Bottom Layer w10: v1(3550,2702) 3605,2757 3605,2868 3694.99,2957.99 J2.13@3740,2957.99
PG13: J1.33 U1.156 | length 1493.9
  Top Layer w10: U1.156@3925.02,3905.33 3925.02,3867.98 3945,3848 v1(3986,3848)
  Bottom Layer w10: v1(3986,3848) 4101.1,3963.1 4571.9,3963.1 4689,3846 4689,3709 4736,3662 4832,3662 4865,3629 4865,3432.01 J1.33@4910,3432.01
PG14: J1.32 U1.157 | length 1640.8
  Top Layer w10: 3900,3973 3900,3950 3905.33,3944.67 ; U1.157@3905.33,3905.33 3905.33,3944.67 ; v1(3916,3973) 3905.33,3962.33 3905.33,3944.67
  Bottom Layer w10: v1(3916,3973) 3941.3,3998.3 3972.58,3998.3 3995.28,4021 4746,4021 4958,3809 4958,3472 4949.5,3463.5 J1.32@4910,3463.5
PH6: J2.8 J3.38 U1.83 | length 3469.8
  Top Layer w10: 3479,2034 3506.3,2006.7 ; v1(3486,2058) v1@3506.3,2037.7 ; J3.38@3506.3,1925 3506.3,2006.7 ; v1(3506.3,2038) v1@3506.3,2037.7 ; 4279,2929.35 4279.35,2929 U1.83@4279.35,2896.24 ; 4279,3072 4310.5,3103.5 ; 3506.3,2006.7 v1@3506.3,2037.7
  Layer 2 w10: v1(3486,2058) 3486,2339 3496,2349 3563,2349 3686,2226 4045,2226 4165,2346 4165,2654 4200,2689 4200,2752 4237.5,2789.5 4410.87,2789.5 4468,2846.63 4468,3168 4416,3220 v1(4271,3220)
  Bottom Layer w10: v1(3506.3,2038) 3630.25,2161.95 3630.25,2693.72 3661.58,2725.06 3661.58,2756.1 3706,2800.51 J2.8@3740,2800.51
PH7: J2.9 J3.39 U1.84 | length 2502.9
  Top Layer w10: 3345,2100 3486.61,1958.39 ; v1(3454,2077) 3454,2027.3 3486.61,1994.69 3486.61,1958.39 ; J3.39@3486.61,1925 3486.61,1958.39 ; v1@4272,2843 v1@4288,2843 ; v1(4280,2835) v1@4288,2843 ; U1.84@4299.04,2896.24 4299.04,2854.04 v1@4288,2843
  Layer 1 w10: v1(3567,2832) 3593.5,2805.5 3669.5,2805.5 v1(3688,2824)
  Layer 3 w10: v1(3688,2824) 3712.18,2799.82 3829.17,2799.82 3899.98,2729 v1(4025,2729)
  Layer 4 w10: v1@3691,2826 3779.5,2737.5 3816,2737.5 3823,2744.5 4009.5,2744.5 v1(4025,2729)
  Bottom Layer w10: v1(3454,2077) 3470.58,2093.58 3470.58,2633.57 3514.87,2677.85 3514.87,2754.88 3567,2807.01 v1(3567,2832) ; v1(3688,2824) 3696.01,2832.01 J2.9@3740,2832.01 ; v1(4025,2729) 4174,2729 v1(4280,2835)
PI3: J2.41 J3.36 U1.134 | length 3561.6
  Top Layer w10: 3219,2482 3264,2437 3264,2387 ; 3279,2064.63 3279,2146 3264,2161 3264,2387 ; v1(3287,2961) 3219,2893 3187,2861 3187,2464 3264,2387 ; 3536,1882.75 3545.67,1892.42 J3.36@3545.67,1925 ; 3545.67,2016.33 3541,2021 3541,2113 3528,2126 3392,2126 3343,2175 3343,2308 3264,2387 ; v1(4297,3802) 4304,3802 4336,3834 4358.09,3856.09 U1.134@4358.09,3905.33
  Layer 4 w10: v1(3287,2961) 3349.39,3023.39 3349.39,3167.39 3376,3194 3408.5,3194 3422.5,3208 ; 3422.5,3328.5 3442,3348 ; 3574.21,3310.29 3673.71,3310.29 ; 3791.62,3192.38 3823.88,3192.38 3855.5,3224 3882.5,3224 3893,3213.5 4019.5,3213.5 v1(4032,3226)
  Bottom Layer w10: J2.41@3925.04,3178.46 3984.46,3178.46 ; v1(4032,3226) 3984.46,3178.46 ; v1(4297,3802) 4281,3786 4281,3690.5 4125.5,3535 4072,3535 4063,3526 4063,3397.5 4096,3364.5 4118.5,3364.5 4139,3344 4139,3287.5 4029.96,3178.46 3984.46,3178.46
PI8: J2.40 J3.35 U1.7 | length 3613.6
  Top Layer w10: 3119,2372 3146,2345 ; 3119,3537 3175,3593 3200,3593 ; v1(3231,2027) 3146,2112 3146,2345 ; J3.35@3565.35,1925 3565.35,1899.65 v1@3577,1888 ; v1(3583,1882) v1@3577,1888 ; 3600,1882 3594,1888 v1@3577,1888 ; v1(3787,3577) 3756,3608 3645,3608 ; 3146,2345 3146,2925.06 3103.06,2968 3103.06,3201.5 3119,3217.44 3119,3512 3200,3593 ; 3200,3593 3237,3630 3237,3717 3213,3741 3213,3771 3224,3782 3333,3782 3409.09,3705.91 U1.7@3450,3705.91 3547.09,3705.91 3634.5,3618.5 ; 3634.5,3618.5 3645,3608 ; 3634.5,3618.5 3634.5,3616 3642.5,3608 3645,3608
  Layer 3 w10: v1(3231,2027) 3376,1882 v1(3583,1882)
  Bottom Layer w10: v1(3787,3577) 3787,3554 3795.5,3545.5 3795.5,3499.5 3829,3466 3829,3277.12 3896.16,3209.96 J2.40@3925.04,3209.96
RESET: C12.1 J1.10 J3.40 P1.5 R6.1 RST.1 U1.31 | length 9688.1
  Top Layer w10: v1(3399,3218) 3414.46,3233.46 U1.31@3450,3233.46 ; J3.40@3466.93,1925 3466.93,1946.05 3422.39,1990.59 ; 4436,1632 5345,1632 RST.1@5345,1675 ; 3422.39,1990.59 3385.98,2027 v1(3369,2027) 3405.41,1990.59 3422.39,1990.59
  Layer 2 w10: v1(3213,3674) 3213,4363 3275,4425 P1.5@3865,4425 ; v1(3369,2027) 3241,2155 3241,2539.5 3229.5,2551 3229.5,3048.5 v1(3399,3218) 3416,3218 3461.5,3263.5 3461.5,3472.5 v1(3528,3539) ; v1(4341.5,1998.5) 4574,2231 4574,2378.5 4560.5,2392 4560.5,2652.5 4576,2668 4576,2858 v1(4581,2863)
  Layer 4 w10: v1(3369,2027) 3764,1632 4436,1632 ; v1(4341.5,1998.5) 4404,1936 4404,1664 4436,1632 ; v1(4581,2863) 4626,2818 4897.5,2818 4914.5,2801 4992,2801 5026,2767 5026,2655 5257.5,2423.5 ; 5345,1632 4436,1632
  Bottom Layer w10: v1(3213,3674) 3265,3674 C12.1@3331.07,3740.07 ; v1(3528,3539) 3484.5,3582.5 3484.5,3664.78 3526.07,3706.35 R6.1@3526.07,3740 ; v1(4581,2863) 4612,2832 4658,2832 4691.08,2865.08 J1.10@4724.96,2865.08 ; C12.1@3331.07,3740.07 C12.1@3331.07,3740.59 R6.1@3526.07,3740.59 R6.1@3526.07,3740 ; C12.1@3331.07,3740.07 3331.07,3740 R6.1@3526.07,3740
VBAT: D1.2 J1.29 | length 844.2
  Top Layer w10: 5217,3044 5261.74,3088.74 5264,3088.74 ; v1(5249,3109.5) 5249,3103.74 5264,3088.74 ; D1.2@5282.4,3088.74 5264,3088.74
  Layer 4 w10: v1(4774,3454) 4762.74,3442.74 4762.74,3388.76 4807.9,3343.6 4808.5,3343 4808.5,3328.5 4884.61,3328.5 5103.61,3109.5 v1(5249,3109.5)
  Bottom Layer w10: J1.29@4724.96,3463.5 4764.5,3463.5 v1(4774,3454)
VCC: R16.2 R20.2 R21.2 | length 1788.4
  Bottom Layer w10: R21.2@2895.06,3465 R20.2@3105.06,3465 3136,3465 3158,3443 3158,3334 3024,3200 2805,3200 2789,3184 2789,2464 2898,2355 R16.2@3000.06,2355
VCC3.3: 3.3V.1 C31.2 C32.2 C37.2 C38.2 C39.2 C40.2 C41.2 C42.2 C43.2 C44.1 C45.1 MOS1.2 P1.4 R6.2 R8.1 R9.1 R17.1 R18.2 R19.1 U2.5 U3.1 U3.3 U3.9 U3.14 U3.27 U3.43 U3.49 U5.8 U6.8 WKUP.2 | length 18269.3
  Top Layer w10: v1(2670,3709) 3.3V.1@2670,3750 ; C42.2@2795.06,2725 2874,2725 v1(2890.5,2725) ; v1(2860,2813.78) 2948.78,2725 ; 2860,3261 v1(2860,3637) 2860,3869 2992,4001 2992,4399 3008,4415 U6.8@3047.99,4415 3157,4415 3190,4448 3385,4448 3413,4420 U5.8@3525,4420 3708,4420 3800,4512 3878,4512 P1.4@3965,4425 ; 2913,2725 2948.78,2725 ; C43.2@3025.06,2725 2948.78,2725 ; v1@3054,2573 3062,2581 ; v1(3253,2563) 3255.06,2565.06 3255.06,2576.94 ; R19.1@3255.06,2635 3255.06,2576.94 ; 3269,2563 3255.06,2576.94 ; v1(3880,2174) 3855,2199 3825.06,2199 C31.2@3825.06,2215 3855,2215 3880,2190 ; 4078,2168 4035.06,2210.94 C32.2@4035.06,2215 ; v1(4078,2187) 4078,2201 4064,2215 ; 4083,2300 v1@4075,2308 ; U3.27@4603.07,2785 4603.07,2737.07 4576.5,2710.5 4576.5,2672 4601,2647.5 4717.9,2647.5 ; 4643.99,2658.5 4706.9,2658.5 4717.9,2647.5 ; v1(4783,2582.4) 4717.9,2647.5 ; MOS1.2@4862.4,1970.79 WKUP.2@5110,1970.79 ; U3.14@5012.52,2785 5012.52,2704.48 5054,2663 5158,2663 ; U3.43@5075.51,2312.56 5075.51,2352 5100.01,2376.5 5144,2376.5 ; v1(5085,1882) 5110,1882 ; WKUP.2@5110,1987.09 WKUP.2@5110,1978 ; 5164.51,2453 5162,2450.49 ; v1(5170,2846) U3.9@5170,2785 5170,2675 5158,2663 ; 5222,2453 5243,2432 ; v1(5230,2663) 5158,2663 ; U3.49@5264.49,2312.56 5264.49,2354.51 5243,2376 5243,2432 ; 5264.49,2520.51 v1(5230,2555) 5162,2487 5162,2450.49 ; 5312.71,2532.29 5279.29,2532.29 5243,2496 5243,2432 ; 5374.98,2937 v1(5358.98,2921) U3.3@5358.98,2785 5358.98,2741.02 5376,2724 5409.97,2724 5421.97,2736 U3.1@5421.97,2785 ; v1(5456.84,2401.84) 5456.84,2388.16 5456.84,1971.84 5408,1923 ; C32.2@4035.06,2215 4035.06,2268.06 v1(4067,2300) ; C32.2@4035.06,2215 4064,2215 ; 4064,2215 4067,2215 v1(4067,2300) ; v1(4067,2300) v1@4075,2308 ; v1(4067,2300) 4067,2316 v1@4075,2308 ; 4067,2513.6 4083,2497.6 4083,2316 v1@4075,2308 ; 4067,2513.6 4048,2532.6 U2.5@4020,2532.6 4020,2512 4053,2479 4056,2479 4067,2468 4067,2513.6 ; 5110,1882 5367,1882 5408,1923 ; 5110,1882 WKUP.2@5110,1970.79 ; WKUP.2@5110,1970.79 WKUP.2@5117.21,1970.79 ; WKUP.2@5110,1970.79 WKUP.2@5110,1978 ; WKUP.2@5110,1978 WKUP.2@5117.21,1970.79 ; WKUP.2@5117.21,1970.79 5165,1923 5320,1923 5408,1923 ; 5144,2376.5 5152,2376.5 5162,2386.5 5162,2450.49 ; 5144,2376.5 5156.5,2389 5156.5,2444.99 5162,2450.49
  Layer 1 w10: v1(2860,2787.13) v1(2860,2813.78) 2860,3209 2938.5,3287.5 2976.5,3287.5 ; v1(2860,3637) v1(3209.5,3287.5) ; v1(2890.5,2725) 2890.5,2775 2874,2791.5 2874,3185 2976.5,3287.5 ; v1(3045,2573) 3243,2573 v1(3253,2563) 3491,2563 v1(3880,2174) ; v1(3259.5,3187.5) v1(3258.5,3188.5) 3249.5,3197.5 3249.5,3247.5 3209.5,3247.5 v1(3209.5,3287.5) ; v1(5170,2846) 5245,2921 5305,2921 ; v1(5230,2846) 5305,2921 ; v1(5358.98,2921) 5305,2921 ; 2976.5,3287.5 v1(3209.5,3287.5)
  Layer 2 w10: v1(2670,3709) 2670,3437 v1(2705,3402) ; v1(2783,3330) 2783,3217.81 v1(2826.38,3174.43) ; v1(3209.5,3287.5) 3366,3287.5 ; v1(3277,3341.5) 3312,3341.5 ; v1(3277,3342.56) 3322.44,3342.56 3323.5,3341.5 ; v1(3395,3768) 3429.5,3733.5 3429.5,3308 3409,3287.5 ; v1(3880,2174) 4065,2174 v1(4078,2187) ; v1(4783,2582.4) 4783,2330.68 4705.04,2252.71 4705.04,1936 4721.04,1920 4746.46,1920 5230,2403.54 v1(5230,2555) v1(5230,2663) v1(5230,2846) 5456.84,2619.16 v1(5456.84,2401.84) ; 3312,3341.5 3323.5,3341.5 ; 3312,3341.5 3366,3287.5 ; 3323.5,3341.5 3377.5,3287.5 ; 3366,3287.5 3377.5,3287.5 ; 3377.5,3287.5 3409,3287.5 ; 3377.5,3287.5 3378.5,3286.5 3408,3286.5 3409,3287.5
  Layer 4 w10: v1(4067,2300) 4083,2300 ; 4083,2284 4083,2300 ; 4485,1882 4501,1882 ; 5110,1882 v1(5085,1882) 4501,1882 ; 4083,2300 4501,1882
  Bottom Layer w10: v1(2670,3709) 2701.59,3740.59 R9.1@2821.07,3740.59 2821.07,3740 2991.07,3740 R8.1@2991.07,3740.59 ; v1(2705,3402) C37.2@2705,3330 v1(2783,3330) ; R18.2@2825.06,2710 2825.06,2752.19 v1(2860,2787.13) ; C38.2@2826.38,3126.93 v1(2826.38,3174.43) 3072.56,3174.43 3185.63,3287.5 v1(3209.5,3287.5) ; v1(3045,2573) 3045.06,2573.06 R17.1@3045.06,2620 ; C39.2@3056.38,3126.93 3259.5,3126.93 ; v1(3258.5,3188.5) 3258.52,3187.48 3259.5,3126.93 ; v1(3259.5,3187.5) 3259.5,3126.93 ; v1(3277,3341.5) 3319.5,3341.5 ; v1(3277,3342.56) 3320.06,3342.56 C45.1@3320.06,3380 ; C40.2@3286.38,3126.93 3259.5,3126.93 ; v1(3395,3768) 3457.59,3830.59 R6.2@3526.07,3830.59 ; C41.2@3516.38,3126.93 3516.38,3144.62 3319.5,3341.5 ; C44.1@3555.06,3400 3521.5,3400 3408,3286.5 3378.5,3286.5 3323.5,3341.5 3319.5,3341.5
VCC3.3M: C13.2 C14.2 C15.2 C16.2 C17.2 C18.2 C19.2 C20.2 C21.2 C22.2 C23.2 C24.2 C25.2 C26.2 C27.2 D1.1 R3.2 R5.2 R8.2 R9.2 U1.15 U1.23 U1.36 U1.49 U1.62 U1.72 U1.82 U1.91 U1.103 U1.114 U1.127 U1.136 U1.149 U1.159 U1.172 | length 15550.2
  Top Layer w10: C26.2@2975.06,3485 2975.06,3827.06 3008,3860 C25.2@3075,3860 v1(3075,3908) ; v1(3307,3519) 3336.43,3548.43 3372.5,3548.43 ; 3344,3532.43 3356.5,3532.43 3372.5,3548.43 ; 3402,3387 3405.95,3390.95 U1.23@3450,3390.95 3510.95,3390.95 ; U1.36@3450,3135.04 3514,3135.04 3517.46,3135.04 3526.48,3135.04 3578.02,3083.5 ; U1.15@3450,3548.43 3372.5,3548.43 ; 3578.06,4219.92 3598.74,4199.24 ; v1(3609.5,4210) 3598.74,4199.24 ; 3610,4143 3610.06,4142.94 3610.06,4187.92 3598.74,4199.24 ; U1.49@3610.06,2896.24 3610.06,2986.06 ; 3610.06,3038.98 3610.06,3011.06 ; U1.172@3610.06,3905.33 3610.06,3944 3597,3957.06 3597,4002.5 ; 3623,3024 3610.06,3011.06 ; 3635.5,3054 3645.5,3064 3645.5,3174.5 3683.5,3212.5 3683.5,3257.83 ; v1(3641,3017) 3610.06,2986.06 ; 3694.5,4050.5 3645,4050.5 3597,4002.5 ; 3697.5,4047.5 3744.5,4047.5 ; U1.62@3865.96,2896.24 3865.96,2983.96 3937,3055 4006,3055 4045.83,3094.83 4045.83,3125.74 4122.59,3202.5 4228.86,3202.5 4250.5,3180.86 4250.5,3087.45 4228.5,3065.45 4228.5,3039.45 4259.67,3008.28 4259.67,2970.83 ; 3865.96,2984 3892,3010.04 3892,3056 3873,3075 ; U1.72@4062.82,2896.24 4062.82,2937.82 4128.98,3003.98 4226.52,3003.98 4259.67,2970.83 ; U1.149@4062.82,3905.33 4062.82,3841.95 4102.5,3802.27 ; 4152.67,3762.59 4112.99,3802.27 4102.5,3802.27 ; U1.82@4259.67,2896.24 4259.67,2970.83 ; U1.136@4318.72,3905.33 4318.72,3860.11 4318.72,3842.55 4306.67,3830.5 4288,3830.5 4268,3810.5 4268,3759 4255.5,3746.5 ; 4332.66,3760.5 4346.66,3746.5 ; 4377.5,3071.5 4377.5,3039.43 4400,3016.93 U1.91@4459.09,3016.93 4496.07,3016.93 4519.55,3016.93 ; 4405.5,3193.5 4398,3201 4398,3232.21 4418.94,3253.15 U1.103@4459.09,3253.15 ; R5.2@4450.06,4210 v1(4450.06,4270) ; U1.114@4459.09,3469.69 4495,3469.69 4512.69,3452 4562,3452 4574,3464 4574,3521 4556,3539 4556,3707.75 4538.16,3725.59 4506.59,3725.59 ; v1(4515,3750) 4515,3734 4506.59,3725.59 ; 4530.5,2918.5 4521,2928 4521,2976 ; 4708,3208 4695.5,3195.5 ; 4928,3208 4967,3247 4967,3256.69 ; R3.2@5135.06,4210 v1(5181,4210) ; D1.1@5207.6,3088.74 5207.6,3323.65 ; v1(5324.94,3272.06) 5273.35,3323.65 5207.6,3323.65 ; 3597,4002.5 3597,4197.5 3598.74,4199.24 ; 3610.06,2986.06 3610.06,3011.06 ; 4102.5,3802.27 4158.27,3746.5 4255.5,3746.5 ; 4255.5,3746.5 4346.66,3746.5 ; 4346.66,3746.5 4367.57,3725.59 U1.127@4459.09,3725.59 4506.59,3725.59 ; 4519.55,3016.93 4521,2976 ; 4519.55,3016.93 4521,3015.48 4521,2992 4521,2976 ; 4521,2976 4562.5,2934.5 4594,2934.5 4619.5,2960 4619.5,3119.5 4634,3134 4695.5,3195.5 ; 4695.5,3195.5 4905.81,3195.5 4967,3256.69 ; 4967,3256.69 5033.96,3323.65 ; 4967,3256.69 4967,3360 5012,3405 ; 5012,3405 5124.13,3405 ; 5012,3405 5128.5,3521.5 5128.5,3737.5 v1(5133,3742) 5133,3464 ; 5033.96,3323.65 5124.13,3405 ; 5033.96,3323.65 5207.6,3323.65 ; 5124.13,3405 5133,3413 5133,3464 ; 5124.13,3405 5192,3405 ; 5133,3464 5192,3405 ; 5192,3405 5207.6,3389.4 5207.6,3323.65
  Layer 2 w10: v1(3307,3519) 3323,3535 3323,3965 3340,3982 ; 3405.95,3390.95 3387,3372 3346,3372 3340,3378 3340,3937 ; v1(3609.5,4210) 3609.5,4206.5 3340,3937 ; v1(3630,4272) 3340,3982 ; v1(5085,4240) 5133,4192 5133,4162 ; v1(5133,3742) 5133,4162 ; v1(5181,4210) 5133,4162 ; 3340,3937 3340,3982
  Layer 3 w10: v1(4515,3750) 5125,3750 v1(5133,3742)
  Layer 4 w10: v1(3641,3017) 3749.65,3017 3774.65,2992 3798,2992
  Bottom Layer w10: v1(3075,3908) 2997.59,3830.59 R8.2@2991.07,3830.59 2991.07,3830 2821.07,3830 R9.2@2821.07,3830.59 2784,3830.59 2674,3940.59 2674,4240 ; C15.2@3240.06,4240 3131,4240 3122.94,4248.06 3020.06,4248.06 C14.2@3020.06,4240 C13.2@2800.06,4240 2674,4240 ; v1(3609.5,4210) 3579.5,4240 C16.2@3460.06,4240 3458,4240 3327.5,4370.5 3061.5,4370.5 3003,4312 2706,4312 2674,4280 2674,4240 ; v1(3630,4272) 3649,4253 3649,4240 C17.2@3680.06,4240 C18.2@3900.06,4240 C19.2@4120.06,4240 4181.5,4240 4301,4359.5 4312,4359.5 ; C20.2@4340.06,4240 4309,4240 4301,4248 4301,4348.5 4312,4359.5 ; v1(5085,4240) C23.2@5010.06,4240 C22.2@4780.06,4240 C21.2@4570.06,4240 4480.06,4240 v1(4450.06,4270) 4360.56,4359.5 4312,4359.5 ; v1(5181,4210) 5211,4240 C24.2@5245.06,4240 ; C27.2@5324.94,3160 v1(5324.94,3272.06)
  other v1: 3830,3024
VCC5: 5V.1 C33.1 F1.1 J1.58 J1.59 J1.60 J3.2 USB.1 | length 6682
  Top Layer w10: 5V.1@2685,3930 2635,3880 2635,2253 2826,2062 ; USB.1@2809,1871.18 USB.1@2826,1871.18 ; F1.1@3016.46,1830 3016.46,1898.54 ; v1(3035,2129) 3016.46,2110.46 ; v1(3215,2194) C33.1@3215,2245 ; J3.2@4214.96,1925 4214.96,1963.96 ; v1(4214.96,2275) 4214.96,1963.96 ; v1@4217,2278 4217,2000 4219,1998 4219,1968 4214.96,1963.96 ; USB.1@2826,1871.18 2826,1920 ; USB.1@2826,1871.18 2893.82,1939 2976,1939 3016.46,1898.54 ; 2826,1920 2954,2048 ; 2826,1920 2826,2062 ; 2826,2062 2840,2048 2954,2048 ; 2954,2048 3016.46,2110.46 ; 3016.46,1898.54 3016.46,2110.46
  Layer 1 w10: v1(3035,2129) 3040.5,2134.5 3274.5,2134.5 ; v1(3215,2194) 3274.5,2134.5 ; v1(4144,2275.02) 4129.02,2275.02 ; v1(4144,2280) v1@4134,2280 ; v1(4144,2290) 4139,2285 4136.51,2282.51 v1@4134,2280 ; 3274.5,2134.5 3971.09,2134.5 ; 3971.09,2134.5 3982.5,2134.5 ; 3971.09,2134.5 4116.59,2280 v1@4134,2280 ; 3982.5,2134.5 3988.5,2134.5 4129.02,2275.02 ; 3982.5,2134.5 4123.02,2275.02 4129.02,2275.02 ; 4129.02,2275.02 v1@4134,2280
  Layer 3 w10: v1(4144,2275.02) v1(4214.96,2275) v1@4219.96,2280 ; v1(4144,2280) v1@4219.96,2280 ; v1(4144,2290) 4214.96,2290 4229.96,2290 ; v1(4831,2568) 4805,2542 4727.5,2542 4711.5,2526 4465.96,2526 4229.96,2290 ; v1@4219.96,2280 4229.96,2290
  Bottom Layer w10: v1(4831,2568) 4876.11,2613.11 J1.59@4910,2613.11 ; J1.60@4910,2581.61 J1.59@4910,2613.11 ; J1.58@4910,2644.61 J1.59@4910,2613.11
VCC_LED: C34.1 MOS1.3 R10.1 R15.2 | length 6032.4
  Top Layer w10: v1(2845,2141) R10.1@2845,2230 ; 4815,1828.79 4825,1838.79 v1(4825,1858) MOS1.3@4825,2069.21
  Layer 1 w10: v1(2845,2141) 3128,1858 v1(4825,1858)
  Layer 4 w10: v1(2845,2141) 2845,2234 2727,2352 2727,3021 2729,3023 2729,3671 2793,3735 3099,3735 3355,3991 ; 3528,3991 3538.5,3980.5 3538.5,3937.5
  Bottom Layer w10: v1(3756,3720) 3825,3789 4030,3789 4044,3803 4044,3858 4064,3878 4129.06,3878 4135.06,3872 4135.06,3860.5 ; R15.2@4135.06,3830 4135.06,3860.5 ; C34.1@4575.06,3740 4575.06,3776 4555,3776 4539,3792 4539,3872 4559,3892 4559,3920 4534,3945 4385,3945 4335,3895 4169.57,3895 4135.06,3860.5
VDDA: C6.2 C7.2 R2.2 R3.1 U1.39 | length 3996.1
  Top Layer w10: 3202.5,3202.44 3202.5,3245.5 3249,3292 v1@3249,3439.33 ; R2.2@3210,3465 3240,3465 ; 3305.5,3207.5 3310.54,3202.46 3310.54,3167.46 3374,3104 3374,3093.98 3392,3075.98 ; 3305.5,3407.5 3251,3462 ; 3328.95,3075.98 3392,3075.98 ; U1.39@3450,3075.98 3392,3075.98 ; C6.2@4790.06,4210 v1(4849,4210) C7.2@4960.06,4210 5018,4210 5060,4210 ; 5060,4120 5108,4120 R3.1@5135.06,4120 ; 3240,3465 3248,3465 ; 3240,3465 3249,3456 v1@3249,3439.33 ; 3240,3465 v1@3249,3439.33 ; 3248,3465 3251,3462 ; 3248,3465 3251,3465 3251,3462 ; v1@3249,3439.33 v1(3251,3432) 3251,3462
  Layer 1 w10: v1(3251,3432) 3019.5,3663.5 3019.5,4161.5 3324,4466 4299,4466 4483,4282 4777,4282 v1(4849,4210)
VREF+: J1.2 R13.1 | length 1644.7
  Layer 1 w10: v1(4783,2632) 4743.5,2671.5 4743.5,2720 4785.5,2762 4846,2762 4922.5,2685.5 4963.5,2685.5 4982,2704 4982,2749.47 4935.47,2796 4935.47,3554.53 4900.83,3589.17 4900.83,3653.83 v1(4933,3686)
  Bottom Layer w10: J1.2@4724.96,2613.11 4764.11,2613.11 v1(4783,2632) ; R13.1@4805.06,3740 4879,3740 v1(4933,3686)
pads on no net: U3.40 U4.1 U4.2 U4.3 U4.4 U4.5 U4.6 U4.10 U4.11 U4.14 U4.15 U4.20 U4.21 U4.22 U4.23 U4.24 U4.25 U4.26 U4.27 U4.28 U4.33 U4.34 U4.35 U4.38 U4.39 U4.40 U4.45 U4.46 U4.47 U4.48 U6.9 USB.4

## Text inside footprints (layer, text, board x,y; h text height)
J3: Top Overlay "1" at 4238.65,1984 h30 r180; Top Overlay "40" at 3490.65,1988 h30 r180